# EAGLE board octo_driver (EAGLE 6.4)
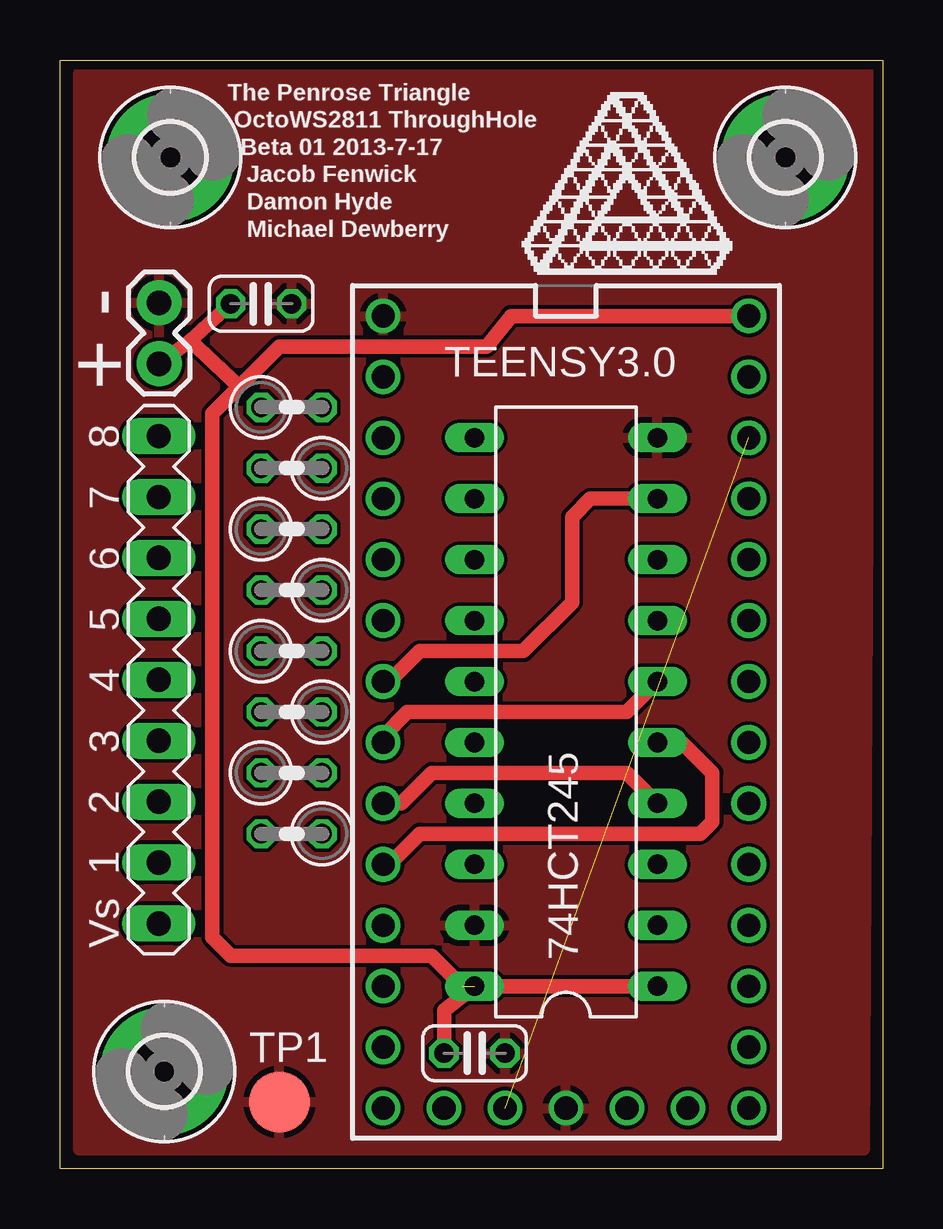
[diagram p0: board, top side]
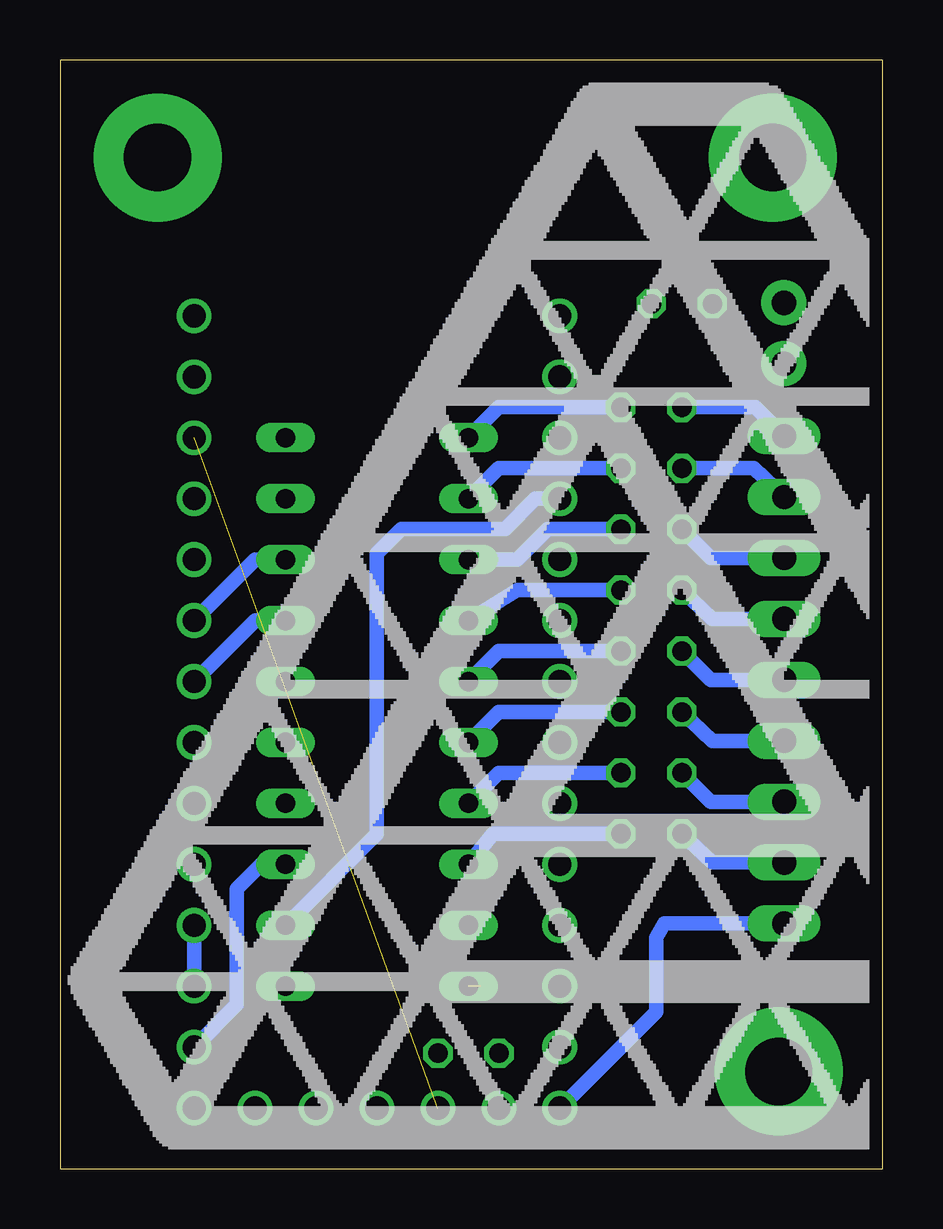
[diagram p1: board, bottom side, seen from below]

Size 34.29 x 46.23 mm. Coordinates in mm from the lower left corner, seen from the top.
Outline: 0,46.23 34.29,46.23 34.29,0 0,0 0,46.23
Copper layers (1*16): Top 0.0356mm / dielectric 1.5011mm / Bottom 0.0356mm
Design rules "LaenPCBOrder": minimum track width 6mil, minimum drill 13mil, track to track 6mil, track to pad 6mil, pad to pad 6mil, via to via 6mil, smd to smd 6mil, copper to edge 15mil, drill to drill 6mil, minimum pad ring 7mil, minimum via ring 7mil, stop-mask expansion 4mil, vias tented up to drill 0mil, thermal gap 10mil

## Footprints (pad centres in the part's own frame; a part is rotated, then mirrored left to right if it is on the bottom)
DIL20 = drill 0.813 long: 1 -11.43,-3.81; 2 -8.89,-3.81; 3 -6.35,-3.81; 4 -3.81,-3.81; 5 -1.27,-3.81; 6 1.27,-3.81; 7 3.81,-3.81; 8 6.35,-3.81; 9 8.89,-3.81; 10 11.43,-3.81; 11 11.43,3.81; 12 8.89,3.81; 13 6.35,3.81; 14 3.81,3.81; 15 1.27,3.81; 16 -1.27,3.81; 17 -3.81,3.81; 18 -6.35,3.81; 19 -8.89,3.81; 20 -11.43,3.81
C025-024X044 = drill 0.813 octagon: 1 -1.27,0; 2 1.27,0
2,8-PAD = drill 2.8 pad 5.334: B2,8 0,0
1X02 = drill 1.016 pad 1.88: 1 0,0; 2 2.54,0
MA09-1 = drill 1.016 long: 1 -10.16,0; 2 -7.62,0; 3 -5.08,0; 4 -2.54,0; 5 0,0; 6 2.54,0; 7 5.08,0; 8 7.62,0; 9 10.16,0
0207/2V = drill 0.813 octagon: 1 -1.27,0; 2 1.27,0
TEENSY_3.0_BASIC = drill 0.965: 0 -7.62,13.97; 1 -7.62,11.43; 2 -7.62,8.89; 3 -7.62,6.35; 3.3V 7.62,11.43; 3.3V1 -2.54,-16.51; 4 -7.62,3.81; 5 -7.62,1.27; 6 -7.62,-1.27; 7 -7.62,-3.81; 8 -7.62,-6.35; 9 -7.62,-8.89; 10 -7.62,-11.43; 11 -7.62,-13.97; 12 -7.62,-16.51; 13 7.62,-16.51; 14/A0 7.62,-13.97; 15/A1 7.62,-11.43; 16/A2 7.62,-8.89; 17/A3 7.62,-6.35; 18/A4 7.62,-3.81; 19/A5 7.62,-1.27; 20/A6 7.62,1.27; 21/A7 7.62,3.81; 22/A8 7.62,6.35; 23/A9 7.62,8.89; AGND 7.62,13.97; GND -7.62,16.51; GND1 0,-16.51; PGM 2.54,-16.51; RESET 5.08,-16.51; VBAT -5.08,-16.51; VIN 7.62,16.51
B2,54 = smd 2.54 x 2.54: TP 0,0

## Placement (x,y rotation side)
74HCT245  74LS245N  [DIL20]  21.08,19.05 90 top
C1  1uF  [C025-024X044]  17.27,4.83 0 top
C2  1uF  [C025-024X044]  8.38,36.07 180 top
E$1  [PENROSELOGO_LOWDPI]  23.62,40.39 0 top
E$2  [PENROSELOGO_1.75IN]  8.38,19.81 0 top
H1  MOUNT-PAD-ROUND2.8  [2,8-PAD]  4.34,4.06 0 top
H2  MOUNT-PAD-ROUND2.8  [2,8-PAD]  4.6,42.16 0 top
H3  MOUNT-PAD-ROUND2.8  [2,8-PAD]  30.23,42.16 0 top
JP1  [1X02]  4.13,36.11 270 top
JP3  [MA09-1]  4.11,20.39 90 top
RLED1  220  [0207/2V]  9.65,31.75 0 top
RLED8  220  [0207/2V]  9.65,29.21 180 top
RLED9  220  [0207/2V]  9.65,26.67 0 top
RLED10  220  [0207/2V]  9.65,24.13 180 top
RLED11  220  [0207/2V]  9.65,21.59 0 top
RLED12  220  [0207/2V]  9.65,19.05 180 top
RLED13  220  [0207/2V]  9.65,16.51 0 top
RLED14  220  [0207/2V]  9.65,13.97 180 top
TEENSY3.0  TEENSY_3.0_BASIC  [TEENSY_3.0_BASIC]  21.08,19.05 0 top
TP1  PTR1B2,54  [B2,54]  9.14,2.79 0 top

## Library data of the parts
74HCT245 = 74xx-us
C1 C2 RLED1 RLED8-RLED14 = rcl
E$1 E$2 = penrose
H1-H3 = holes
JP1 = SparkFun-Connectors
JP3 = penrose-con-lstb; OC_FARNELL: unknown; OC_NEWARK: unknown
TEENSY3.0 = Teensy3.0
TP1 = testpad

## Nets
3.3V: TEENSY3.0.3.3V TEENSY3.0.3.3V1
AGND: TEENSY3.0.AGND
GND: 74HCT245.10 74HCT245.19 C1.2 C2.1 H1.B2,8 H2.B2,8 H3.B2,8 JP1.1 TEENSY3.0.GND TEENSY3.0.GND1 TP1.TP
LED1: 74HCT245.2 TEENSY3.0.2
N$1: JP3.9 RLED1.1
N$2: 74HCT245.8 TEENSY3.0.21/A7
N$3: TEENSY3.0.15/A1 TEENSY3.0.16/A2
N$4: 74HCT245.3 TEENSY3.0.14/A0
N$5: 74HCT245.4 TEENSY3.0.7
N$6: 74HCT245.5 TEENSY3.0.8
N$7: 74HCT245.6 TEENSY3.0.6
N$8: JP3.8 RLED8.2
N$9: 74HCT245.7 TEENSY3.0.20/A6
N$10: JP3.7 RLED9.1
N$11: JP3.6 RLED10.2
N$12: JP3.5 RLED11.1
N$13: JP3.4 RLED12.2
N$14: JP3.3 RLED13.1
N$15: JP3.2 RLED14.2
N$16: 74HCT245.11 RLED1.2
N$17: 74HCT245.12 RLED8.1
N$18: 74HCT245.14 RLED10.1
N$19: 74HCT245.13 RLED9.2
N$20: 74HCT245.16 RLED12.1
N$21: 74HCT245.15 RLED11.2
N$22: 74HCT245.18 RLED14.1
N$23: 74HCT245.17 RLED13.2
N$26: 74HCT245.9 TEENSY3.0.5
VBAT: TEENSY3.0.VBAT
VCC: 74HCT245.1 74HCT245.20 C1.1 C2.2 JP1.2 TEENSY3.0.VIN
VSYNC: JP3.1 TEENSY3.0.12

## Tracks (layer width: path | path; a pad name or v marks a point on that pad's centre or on a via)
3.3V  (1 unrouted)
GND
  pour Top: 33.78,45.72 33.53,0.76 0.76,0.76 0.76,45.72
LED1
  Bottom 0.61: TEENSY3.0.2 14.48,27.94 15.75,26.67 20.07,26.67 21.08,25.65 21.08,13.97 74HCT245.2
N$1
  Bottom 0.61: RLED1.1 5.31,31.75 JP3.9
N$2
  Bottom 0.61: 74HCT245.8 26.16,25.4 TEENSY3.0.21/A7
N$3
  Bottom 0.61: TEENSY3.0.15/A1 TEENSY3.0.16/A2
N$4
  Bottom 0.61: 74HCT245.3 25.91,12.7 26.92,11.68 26.92,6.86 TEENSY3.0.14/A0
N$5
  Top 0.61: TEENSY3.0.7 14.22,15.24 15.49,16.51 23.62,16.51 74HCT245.4
N$6
  Top 0.61: TEENSY3.0.8 13.72,12.7 14.99,13.97 26.67,13.97 27.18,14.48 27.18,16.51 25.91,17.78 74HCT245.5
N$7
  Top 0.61: TEENSY3.0.6 13.46,18.03 14.48,19.05 23.62,19.05 74HCT245.6
N$8
  Bottom 0.61: RLED8.2 5.38,29.21 JP3.8
N$9
  Bottom 0.61: 74HCT245.7 26.16,22.86 TEENSY3.0.20/A6
N$10
  Bottom 0.61: JP3.7 7.18,25.47 RLED9.1
N$11
  Bottom 0.61: JP3.6 7.11,22.93 RLED10.2
N$12
  Bottom 0.61: JP3.5 7.18,20.39 RLED11.1
N$13
  Bottom 0.61: JP3.4 7.11,17.85 RLED12.2
N$14
  Bottom 0.61: JP3.3 7.18,15.31 RLED13.1
N$15
  Bottom 0.61: JP3.2 7.11,12.77 RLED14.2
N$16
  Bottom 0.61: RLED1.2 16,31.75 74HCT245.11
N$17
  Bottom 0.61: 74HCT245.12 16,29.21 RLED8.1
N$18
  Bottom 0.61: RLED10.1 15.24,24.13 74HCT245.14
N$19
  Bottom 0.61: RLED9.2 13.97,26.67 15.24,25.4 74HCT245.13
N$20
  Bottom 0.61: 74HCT245.16 16,19.05 RLED12.1
N$21
  Bottom 0.61: RLED11.2 16,21.59 74HCT245.15
N$22
  Bottom 0.61: RLED14.1 16.26,13.97 74HCT245.18
N$23
  Bottom 0.61: RLED13.2 16,16.51 74HCT245.17
N$26
  Top 0.61: TEENSY3.0.5 13.72,20.32 14.99,21.59 19.3,21.59 21.34,23.62 21.34,27.18 22.1,27.94 74HCT245.9
VCC  (1 unrouted)
  Top 0.406: C2.2
  Top 0.61: TEENSY3.0.VIN 18.8,35.56 17.78,34.29 9.14,34.29 7.48,32.62 | 7.48,32.62 6.35,31.5 6.35,9.65 7.11,8.89 15.49,8.89 16.76,7.62 74HCT245.1 | JP1.2 5.43,34.54 | 5.43,34.54 7.48,32.62 | 5.43,34.54 C2.2 | 74HCT245.20 16,6.6 C1.1
VSYNC
  Bottom 0.61: JP3.1 9.12,10.23 9.45,9.65 9.45,6.55 TEENSY3.0.12

## Text on the board
tNames: The Penrose Triangle / OctoWS2811 ThroughHole / Beta 01 2013-7-17 / Jacob Fenwick / Damon Hyde / Michael Dewberry | - | +